# Altium PCB Ver1.0-2230_2023-12-28.pcbdoc
Units mm, origin at the board's own origin, x right, y up, seen from the top; angles counter-clockwise.
Board outline 52.32 x 60.2 mm, 2 copper layers (Top Layer, Bottom Layer); 27 components, 54 nets, 384 pads, 83 vias.
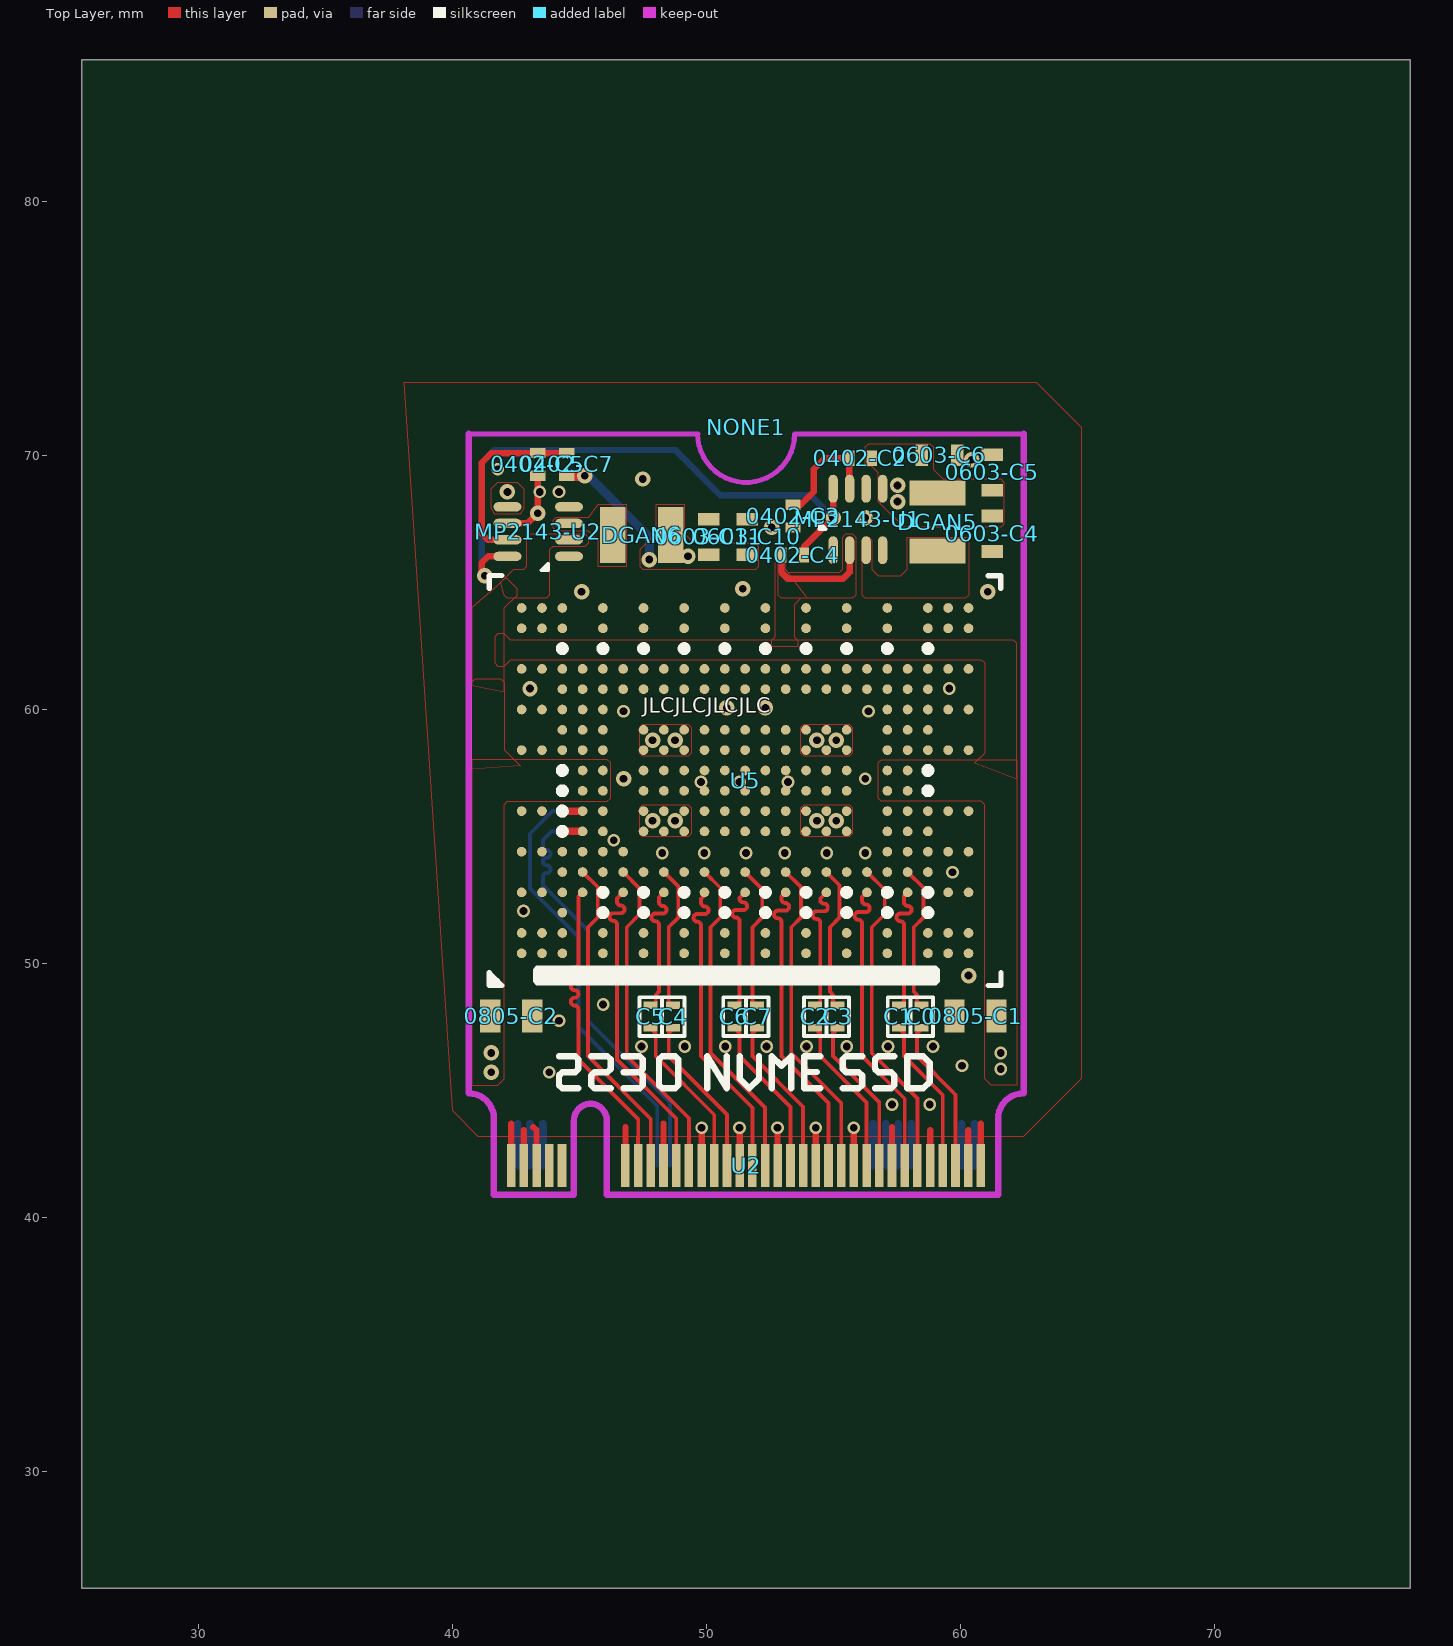
[diagram p0: Top Layer view]
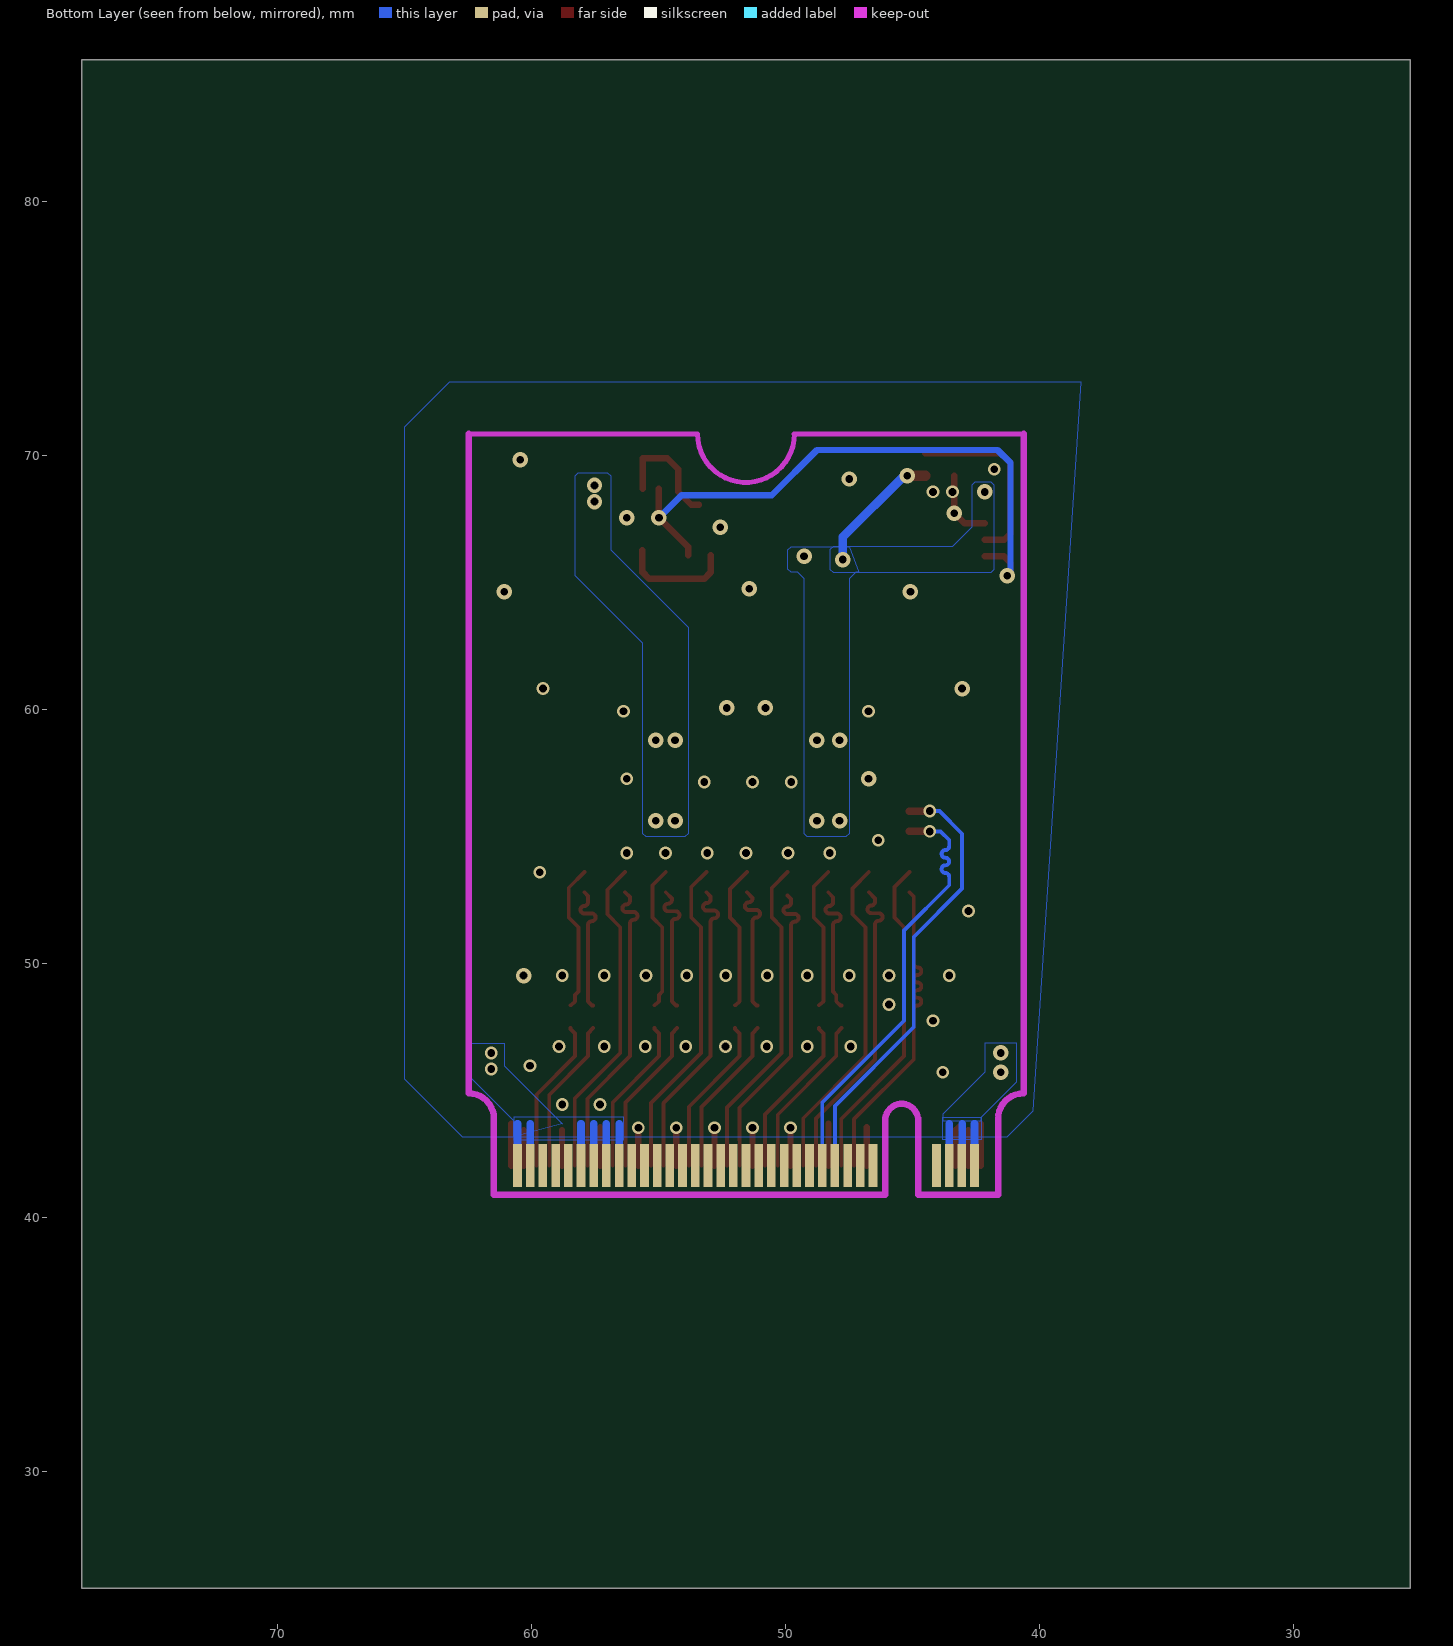
[diagram p1: Bottom Layer view, seen from below]

## Layer stack, top to bottom
Top Layer: signal copper (thickness not stored)
Dielectric: dielectric 0.32, FR-4, Dk 4.8
Bottom Layer: signal copper (thickness not stored)

## Board outline
77.724,25.4 25.4,25.4 25.4,85.598 77.724,85.598

## Components (designator, comment, footprint, x,y, rotation, side; value= is the part's Value field where it differs from the comment)
0402-C2 "_" ?#1 59.182,71.12 r0 top
0402-C3 "_" ?#1 52.197,70.739 r90 top
0402-C4 "_" ?#1 56.515,67.31 r0 top
0402-C5 "_" ?#1 44.577,66.548 r270 top
0402-C7 "_" ?#1 45.72,66.548 r270 top
0603-C4 "_" ?#2 62.484,64.008 r270 top
0603-C5 "_" ?#2 62.484,66.421 r270 top
0603-C6 "_" ?#2 62.103,71.247 r0 top
0603-C10 "_" ?#2 52.832,63.881 r270 top
0603-C11 "_" ?#2 51.308,63.881 r270 top
0805-C1 "_" ?#3 63.373,49.149 r0 top
0805-C2 "_" ?#3 45.085,49.149 r0 top
C0 "0402" ?#4 59.69,47.371 r270 top
C1 "0402" ?#4 58.801,47.371 r270 top
C2 "0402" ?#4 55.499,47.371 r270 top
C3 "0402" ?#4 56.388,47.371 r270 top
C4 "0402" ?#4 49.911,47.371 r270 top
C5 "0402" ?#4 49.022,47.371 r270 top
C6 "0402" ?#4 52.324,47.371 r270 top
C7 "0402" ?#4 53.213,47.371 r270 top
DGAN5 "_" ?#5 60.325,66.167 r270 top
DGAN6 "_" ?#5 46.228,65.659 r180 top
MP2143-U1 "_" ?#6 59.563,68.707 r0 top
MP2143-U2 "_" ?#6 42.164,70.612 r90 top
NONE1 "_" ?#7 51.562,71.12 r0 top
U2 "M.2 M KEY FINGERS" "M.2 M KEY FINGERS" 51.562,40.894 r270 top
U5 "1620 BGA291SSD" "1620 BGA291SSD" 51.435,57.15 r0 top

## Footprints (in the part's own frame and the unit in brackets; to place one, negate y for a bottom-side part, rotate by r counter-clockwise, add the part's x,y. Pads: shape width x height; smd on the part's side, far side on the other; paste and mask are expansions set on the pad)
"1620 BGA291SSD" [mil]
  round 15.06 smd paste-3937 mask+2: A1(-342.92,-265.44) A2(-342.92,-233.94) A4(-342.92,-170.95) A6(-342.92,-107.96) A8(-342.92,-44.97) A11(-342.92,49.52) A13(-342.92,112.51) A15(-342.92,175.51) A17(-342.92,238.5) A18(-342.92,269.99) AA1(287,-265.44) AA2(287,-233.94) AA5(287,-139.45) AA6(287,-107.96) AA7(287,-76.46) AA8(287,-44.97) AA11(287,49.52) AA12(287,81.02) AA13(287,112.51) AA14(287,144.01) AA15(287,175.51) AA17(287,238.5) AA18(287,269.99) AB1(318.5,-265.44) AB2(318.5,-233.94) AB4(318.5,-170.95) AB6(318.5,-107.96) AB8(318.5,-44.97) AB11(318.5,49.52) AB13(318.5,112.51) AB15(318.5,175.51) AB17(318.5,238.5) AB18(318.5,269.99) AC1(350,-265.44) AC2(350,-233.94) AC4(350,-170.95) AC6(350,-107.96) AC8(350,-44.97) AC11(350,49.52) AC13(350,112.51) AC15(350,175.51) AC17(350,238.5) AC18(350,269.99) B1(-311.42,-265.44) B2(-311.42,-233.94) B4(-311.42,-170.95) B6(-311.42,-107.96) B8(-311.42,-44.97) B11(-311.42,49.52) B13(-311.42,112.51) B15(-311.42,175.51) B17(-311.42,238.5) B18(-311.42,269.99) C1(-279.92,-265.44) C2(-279.92,-233.94) C3(-279.92,-202.44) C4(-279.92,-170.95) C5(-279.92,-139.45) C6(-279.92,-107.96) C11(-279.92,49.52) C12(-279.92,81.02) C13(-279.92,112.51) C14(-279.92,144.01) C15(-279.92,175.51) C17(-279.92,238.5) C18(-279.92,269.99) D4(-248.43,-170.95) D5(-248.43,-139.45) D6(-248.43,-107.96) D7(-248.43,-76.46) D8(-248.43,-44.97) D9(-248.43,-13.47) D10(-248.43,18.03) D11(-248.43,49.52) D12(-248.43,81.02) D13(-248.43,112.51) D14(-248.43,144.01) D15(-248.43,175.51) E1(-216.93,-265.44) E2(-216.93,-233.94) E5(-216.93,-139.45) E6(-216.93,-107.96) E7(-216.93,-76.46) E8(-216.93,-44.97) E9(-216.93,-13.47) E10(-216.93,18.03) E11(-216.93,49.52) E12(-216.93,81.02) E13(-216.93,112.51) E14(-216.93,144.01) E15(-216.93,175.51) E17(-216.93,238.5) E18(-216.93,269.99) F4(-185.44,-170.95) F5(-185.44,-139.45) F6(-185.44,-107.96) F14(-185.44,144.01) F15(-185.44,175.51) G1(-153.94,-265.44) G2(-153.94,-233.94) G5(-153.94,-139.45) G7(-153.94,-76.46) G8(-153.94,-44.97) G9(-153.94,-13.47) G10(-153.94,18.03) G11(-153.94,49.52) G12(-153.94,81.02) G14(-153.94,144.01) G15(-153.94,175.51) G17(-153.94,238.5) G18(-153.94,269.99) H4(-122.44,-170.95) H5(-122.44,-139.45) H7(-122.44,-76.46) H8(-122.44,-44.97) H9(-122.44,-13.47) H10(-122.44,18.03) H11(-122.44,49.52) H12(-122.44,81.02) H14(-122.44,144.01) H15(-122.44,175.51) J1(-90.95,-265.44) J2(-90.95,-233.94) J5(-90.95,-139.45) J7(-90.95,-76.46) J8(-90.95,-44.97) J9(-90.95,-13.47) J10(-90.95,18.03) J11(-90.95,49.52) J12(-90.95,81.02) J14(-90.95,144.01) J15(-90.95,175.51) J17(-90.95,238.5) J18(-90.95,269.99) K4(-59.45,-170.95) K5(-59.45,-139.45) K7(-59.45,-76.46) K8(-59.45,-44.97) K9(-59.45,-13.47) K10(-59.45,18.03) K11(-59.45,49.52) K12(-59.45,81.02) K14(-59.45,144.01) K15(-59.45,175.51) L1(-27.96,-265.44) L2(-27.96,-233.94) L5(-27.96,-139.45) L7(-27.96,-76.46) L8(-27.96,-44.97) L9(-27.96,-13.47) L10(-27.96,18.03) L11(-27.96,49.52) L12(-27.96,81.02) L14(-27.96,144.01) L15(-27.96,175.51) L17(-27.96,238.5) L18(-27.96,269.99) M4(3.54,-170.95) M5(3.54,-139.45) M7(3.54,-76.46) M8(3.54,-44.97) M9(3.54,-13.47) M10(3.54,18.03) M11(3.54,49.52) M12(3.54,81.02) M14(3.54,144.01) M15(3.54,175.51) N1(35.04,-265.44) N2(35.04,-233.94) N5(35.04,-139.45) N7(35.04,-76.46) N8(35.04,-44.97) N9(35.04,-13.47) N10(35.04,18.03) N11(35.04,49.52) N12(35.04,81.02) N14(35.04,144.01) N15(35.04,175.51) N17(35.04,238.5) N18(35.04,269.99) P4(66.53,-170.95) P5(66.53,-139.45) P7(66.53,-76.46) P8(66.53,-44.97) P9(66.53,-13.47) P10(66.53,18.03) P11(66.53,49.52) P12(66.53,81.02) P14(66.53,144.01) P15(66.53,175.51) R1(98.03,-265.44) R2(98.03,-233.94) R5(98.03,-139.45) R7(98.03,-76.46) R8(98.03,-44.97) R9(98.03,-13.47) R10(98.03,18.03) R11(98.03,49.52) R12(98.03,81.02) R14(98.03,144.01) R15(98.03,175.51) R17(98.03,238.5) R18(98.03,269.99) T4(129.52,-170.95) T5(129.52,-139.45) T7(129.52,-76.46) T8(129.52,-44.97) T9(129.52,-13.47) T10(129.52,18.03) T11(129.52,49.52) T12(129.52,81.02) T14(129.52,144.01) T15(129.52,175.51) U1(161.02,-265.44) U2(161.02,-233.94) U5(161.02,-139.45) U7(161.02,-76.46) U8(161.02,-44.97) U9(161.02,-13.47) U10(161.02,18.03) U11(161.02,49.52) U12(161.02,81.02) U14(161.02,144.01) U15(161.02,175.51) U17(161.02,238.5) U18(161.02,269.99) V4(192.52,-170.95) V5(192.52,-139.45) V14(192.52,144.01) V15(192.52,175.51) W1(224.01,-265.44) W2(224.01,-233.94) W5(224.01,-139.45) W6(224.01,-107.96) W7(224.01,-76.46) W8(224.01,-44.97) W9(224.01,-13.47) W10(224.01,18.03) W11(224.01,49.52) W12(224.01,81.02) W13(224.01,112.51) W14(224.01,144.01) W15(224.01,175.51) W17(224.01,238.5) W18(224.01,269.99) Y4(255.51,-170.95) Y5(255.51,-139.45) Y6(255.51,-107.96) Y7(255.51,-76.46) Y8(255.51,-44.97) Y9(255.51,-13.47) Y10(255.51,18.03) Y11(255.51,49.52) Y12(255.51,81.02) Y13(255.51,112.51) Y14(255.51,144.01) Y15(255.51,175.51)
  silkscreen extent -393,-316 400,320
"M.2 M KEY FINGERS" [mm]
  rect 1.7x0.34 smd paste+0 mask+0.102: 1(-1.15,9.25) 3(-1.15,8.75) 5(-1.15,8.249) 7(-1.15,7.749) 9(-1.15,7.249) 11(-1.15,6.749) 13(-1.15,6.249) 15(-1.15,5.749) 17(-1.15,5.249) 19(-1.15,4.749) 21(-1.15,4.249) 23(-1.15,3.749) 25(-1.15,3.249) 27(-1.15,2.749) 29(-1.15,2.249) 31(-1.15,1.749) 33(-1.15,1.249) 35(-1.15,0.749) 37(-1.15,0.249) 39(-1.15,-0.251) 41(-1.15,-0.751) 43(-1.15,-1.251) 45(-1.15,-1.751) 47(-1.15,-2.251) 49(-1.15,-2.751) 51(-1.15,-3.251) 53(-1.15,-3.751) 55(-1.15,-4.251) 57(-1.15,-4.751) 67(-1.15,-7.251) 69(-1.15,-7.751) 71(-1.15,-8.251) 73(-1.15,-8.751) 75(-1.15,-9.251)
  rect 1.7x0.34 smd far side paste+0 mask+0.102: 2(-1.15,9) 4(-1.15,8.501) 6(-1.15,8.001) 8(-1.15,7.501) 10(-1.15,7.001) 12(-1.15,6.501) 14(-1.15,6.001) 16(-1.15,5.501) 18(-1.15,5.001) 20(-1.151,4.499) 22(-1.15,4.001) 24(-1.15,3.501) 26(-1.15,3.001) 28(-1.15,2.501) 30(-1.15,2.001) 32(-1.15,1.501) 34(-1.15,1.001) 36(-1.15,0.501) 38(-1.15,0.001) 40(-1.15,-0.499) 42(-1.151,-0.998) 44(-1.15,-1.499) 46(-1.15,-1.999) 48(-1.15,-2.499) 50(-1.15,-2.999) 52(-1.15,-3.499) 54(-1.15,-3.999) 56(-1.15,-4.499) 58(-1.15,-4.999) 68(-1.15,-7.499) 70(-1.15,-7.999) 72(-1.15,-8.499) 74(-1.15,-8.999)
  Keep-Out Layer lines w0.254: -3,-9.93 0,-9.93 0,-6.78 -2.9,-6.78 ; -2.9,-5.48 0,-5.48 0,9.93 -3,9.93
  Keep-Out Layer lines w0.254: -4,-10.93 cw(c-3,-10.93) -3,-9.93 ; -2.9,-6.78 cw(c-2.931,-6.13) -2.9,-5.48 ; -3,9.93 cw(c-3,10.93) -4,10.93
?#1 [mm]
  rect 0.4x0.6 smd paste+0 mask+0.051: 1(-3.557,-1.217) 1(-2.668,-1.217)
?#2 [mm]
  rect 0.5x0.85 smd paste+0 mask+0.051: 2(-3.624,-1.219) 2(-2.227,-1.219)
?#3 [mm]
  rect 0.8x1.3 smd paste+0 mask+0.05: 1(-1.947,-1.217) 2(-3.598,-1.217)
?#4 [mm]
  rect 0.3x0.55 smd paste+0 mask+0.051: 1(-0.985,-1.217) 1(-0.096,-1.217)
  silkscreen extent -1.31,-1.66 0.22,-0.77
?#5 [mm]
  rect 1x2.2 smd paste+0 mask+0.05: 2(-2.369,-1.219) 2(-0.083,-1.219)
?#6 [mm]
  oval 0.364x1.1 smd paste+0 mask+0.051: 1(-4.571,-2.423) 2(-3.921,-2.423) 3(-3.271,-2.423) 4(-2.62,-2.423) 5(-2.62,-0.001) 6(-3.271,-0.001) 7(-3.921,-0.001) 8(-4.571,-0.001)
  silkscreen extent -5.12,-1.59 -4.87,-1.34
?#7 [mm]
  Keep-Out Layer lines w0.2: -10.93,-0.257 -1.9,-0.257 ; 1.91,-0.257 10.93,-0.257
  Keep-Out Layer lines w0.2: -1.904,-0.257 ccw(c0.005,-0.257) 1.914,-0.257

## Via types
v1: diameter 0.5, hole 0.305, Top Layer to Bottom Layer, tented both sides, 52 vias
v2: diameter 0.61, hole 0.305, Top Layer to Bottom Layer, tented both sides, 31 vias

## Nets (pads, with @x,y where several pads share a name; then routed paths per layer and width w, separated by ;. In a path a pad name is that pad's centre, name@x,y a point inside that pad or via, vN(x,y) a via of type N, cw(c..) or ccw(c..) an arc to the next point about the centre after c; other vN are vias at no path point)
1.2V: 0402-C7.1@44.503,69.216 0603-C10.2@51.613,66.108 0603-C11.2@50.089,66.108 DGAN6.2@48.597,66.878 MP2143-U2.5 U5.G7 U5.G8 U5.G11 U5.G12 U5.H7 U5.H8 U5.H11 U5.H12 U5.J7 U5.J8 U5.J11 U5.J12 | length 5.1
  Top Layer w0.4: 0402-C7.1@44.503,69.215 v2(45.212,69.215)
  Bottom Layer w0.35: v2(45.212,69.215) 45.339,69.215 47.752,66.802 v2(47.752,65.913)
  other v2: 47.879,55.626 48.768,55.626 47.879,58.801 48.768,58.801 49.276,66.04 42.164,68.58
1.8V: 0402-C2.1@56.514,69.903 0603-C4.2@61.265,67.632 0603-C5.2@61.265,68.648 0603-C6.2@58.479,70.028 DGAN5.2@59.106,68.536 MP2143-U1.5 U5.R7 U5.R8 U5.R11 U5.R12 U5.T7 U5.T8 U5.T11 U5.T12 U5.U7 U5.U8 U5.U11 U5.U12
  other v2: 54.356,55.626 55.118,55.626 54.356,58.801 55.118,58.801 57.531,68.199 57.531,68.834
3.3V: 0402-C4.1@52.958,66.093 0805-C1.1 0805-C2.2 MP2143-U1.2 MP2143-U2.2 U2.2 U2.4 U2.12 U2.14 U2.16 U2.18 U2.70 U2.72 U2.74 U5.D9 U5.D10 U5.E9 U5.E10 U5.W9 U5.W10 U5.Y9 U5.Y10 | length 19.2
  Top Layer w0.254: 0402-C4.1@52.958,66.093 52.958,65.406 53.213,65.151 55.372,65.151 55.642,65.421 MP2143-U1.2
  Bottom Layer w0.3: U2.74 42.563,43.688 ; 43.053,43.688 U2.72 ; U2.70 43.563,43.688 ; U2.18 56.563,43.688 ; U2.16 57.064,43.688 ; U2.14 57.563,43.688 ; U2.12 58.063,43.688 ; U2.4 60.063,43.688 ; U2.2 60.562,43.688
  other v1: 61.595,45.847 61.595,46.482
  other v2: 41.529,45.72 41.529,46.482
EN: 0402-C4.1@53.847,66.093 MP2143-U1.8 MP2143-U2.8 | length 24.4
  Top Layer w0.25: v2(41.275,65.278) 41.148,65.405 41.148,65.786 41.403,66.041 MP2143-U2.8
  Top Layer w0.254: 0402-C4.1@53.847,66.093 53.847,66.42 v2(54.991,67.564) 54.992,67.565 MP2143-U1.8
  Bottom Layer w0.25: v2(41.275,65.278) 41.148,65.405 41.148,69.723 41.656,70.231 48.768,70.231 50.546,68.453 54.102,68.453 v2(54.991,67.564)
FB: 0402-C2.1@55.625,69.903 0402-C3.1@53.414,68.071 0402-C5.1@43.36,70.105 0402-C7.1@44.503,70.105 MP2143-U1.7 MP2143-U2.7 | length 12.1
  Top Layer w0.254: MP2143-U2.7 41.387,66.69 41.148,66.929 41.148,69.723 41.529,70.104 0402-C5.1@43.36,70.104 ; 0402-C5.1@43.36,70.105 0402-C7.1@44.503,70.105 ; 0402-C3.1@53.414,68.071 53.72,68.071 54.229,68.58 54.229,69.469 54.663,69.903 55.625,69.903 MP2143-U1.7@55.625,68.706
GND: 0402-C3.1@53.414,67.182 0402-C5.1@43.36,69.216 0603-C4.2@61.265,66.235 0603-C5.2@61.265,70.045 0603-C6.2@59.876,70.028 0603-C10.2@51.613,67.505 0603-C11.2@50.089,67.505 0805-C1.2 0805-C2.1 MP2143-U1.4 MP2143-U1.6 MP2143-U2.4 MP2143-U2.6 U2.1 U2.3 U2.9 U2.15 U2.21 U2.27 U2.33 U2.39 U2.45 U2.51 U2.57 U2.71 U2.73 U2.75 U5.AA1 U5.AA2 U5.AA5 U5.AA14 U5.AA15 U5.C1 U5.C2 U5.C3 U5.C4 U5.C5 U5.C15 U5.D6 U5.D11 U5.E1 U5.E2 U5.E5 U5.E6 U5.E7 U5.E11 U5.E14 U5.E15 U5.F6 U5.G1 U5.G2 U5.G5 U5.G9 U5.G10 U5.G14 U5.G15 U5.H9 U5.H10 U5.J1 U5.J2 U5.J5 U5.J9 U5.J10 U5.J14 U5.J15 U5.K7 U5.K8 U5.K9 U5.K10 U5.K11 U5.K12 U5.L1 U5.L2 U5.L5 U5.L14 U5.L15 U5.M9 U5.M10 U5.N1 U5.N2 U5.N5 U5.N14 U5.N15 U5.P7 U5.P8 U5.P9 U5.P10 U5.P11 U5.P12 U5.R1 U5.R2 U5.R5 U5.R9 U5.R10 U5.R14 U5.R15 U5.T9 U5.T10 U5.U1 U5.U2 U5.U5 U5.U9 U5.U10 U5.U14 U5.U15 U5.W1 U5.W2 U5.W5 U5.W6 U5.W11 U5.W14 U5.W15 U5.Y6 U5.Y11 U5.Y13 | length 40.4
  Top Layer w0.2: U2.75 42.311,43.434 ; U2.73 42.811,43.307 ; U2.71 43.311,43.434 ; U2.57 46.811,43.307 ; U2.51 48.311,43.307 ; U2.45 49.811,43.18 ; U2.39 51.311,43.18 ; U2.33 52.811,43.18 ; U2.27 54.311,43.18 ; U2.15 57.311,43.307 ; U2.9 58.811,43.307 ; U2.3 60.312,43.434 ; U2.1 60.812,43.434
  Top Layer w0.25: U2.75 42.311,43.688 ; U2.73 42.811,43.434 ; 43.18,43.561 43.311,43.43 U2.71 ; U2.57 46.811,43.561 ; U2.51 48.311,43.688 ; U2.45 v1(49.812,43.532) ; v1(51.308,43.532) U2.39 ; v1(52.802,43.532) U2.33 ; U2.27 v1(54.312,43.532) ; v1(55.802,43.532) U2.21 ; U2.15 57.311,43.561 ; U2.9 58.811,43.434 ; U2.3 60.312,43.434 ; U2.1 60.812,43.688
  Top Layer w0.254: MP2143-U2.6 42.957,67.341 v2(43.36,67.744) 0402-C5.1@43.36,69.216
  other v1: 57.312,44.45 58.801,44.45 43.815,45.72 60.071,45.974 47.442,46.736 49.149,46.736 50.742,46.736 52.372,46.736 53.942,46.736 55.532,46.736 57.15,46.736 58.928,46.736 44.196,47.752 45.932,48.387 43.561,49.53 45.932,49.53 47.498,49.53 49.149,49.53 50.722,49.53 52.362,49.53 53.902,49.53 55.499,49.53 57.15,49.53 58.801,49.53 42.799,52.07 59.69,53.594 48.26,54.356 49.911,54.356 51.562,54.356 53.086,54.356 54.737,54.356 56.261,54.356 46.355,54.864 49.784,57.15 51.308,57.15 53.213,57.15 56.261,57.277 46.736,59.944 56.388,59.944 59.563,60.833 43.434,68.58 44.196,68.58 41.783,69.469
  other v2: 60.325,49.53 46.736,57.277 50.8,60.071 52.324,60.071 43.053,60.833 45.085,64.643 61.087,64.643 51.435,64.77 52.578,67.183 56.261,67.564 47.498,69.088 60.452,69.85
POWERGOOD: MP2143-U1.1 MP2143-U2.1
S$17489: 
S$17493: 
S$31860: 
S$31862: 
S$55852: 
S$81905: 
S$82656: U2.13 U5.V4 | length 12.3
  Top Layer w0.15: U5.V4 56.134,52.619 56.134,52.48 ccw(c56.284,52.48) 56.284,52.33 cw(c56.282,52.18) 56.284,52.03 56.134,52.03 55.984,52.03 ccw(c55.986,51.88) 55.984,51.73 cw(c55.984,51.58) 56.134,51.58 56.134,46.355 57.81,44.679 U2.13
S$82660: U2.11 U5.V5 | length 12.8
  Top Layer w0.15: U5.V5 57.023,52.911 57.023,51.943 56.515,51.435 56.515,46.482 58.311,44.686 U2.11
S$89547: C1.1 U2.7 U5.Y4 | length 11.6
  Top Layer w0.15: C1.1@57.584,48.356 57.627,48.356 57.785,48.514 57.785,48.768 57.785,51.522 ccw(c57.635,51.522) 57.635,51.672 cw(c57.637,51.822) 57.635,51.972 57.785,51.972 57.935,51.972 ccw(c57.933,52.122) 57.935,52.272 cw(c57.935,52.422) 57.785,52.422 57.785,52.668 U5.Y4@57.925,52.808 ; C1.1@57.584,47.468 57.785,47.244 57.785,46.99 57.785,46.355 59.312,44.828 U2.7
S$89551: C0.1 U2.5 U5.Y5 | length 11.9
  Top Layer w0.15: U5.Y5 58.547,52.987 58.547,51.816 58.166,51.435 58.166,48.895 58.293,48.768 58.293,48.514 C0.1@58.473,48.357 ; C0.1@58.473,47.468 58.473,47.424 58.293,47.244 58.293,46.99 58.293,46.355 59.812,44.836 U2.5
S$89662: C2.1@54.282,47.467 | length 6.3
  Top Layer w0.15: C2.1@54.282,47.468 54.483,47.244 54.483,46.99 54.483,46.355 56.312,44.526 56.312,43.129 ; 56.311,42.044 56.311,43.18
S$89666: C3.1@55.171,47.467 | length 6.3
  Top Layer w0.15: C3.1@55.171,47.468 55.171,47.424 54.991,47.244 54.991,46.99 54.991,46.355 56.812,44.534 56.812,43.086 ; 56.811,42.044 56.811,43.18
S$89676: C2.1@54.282,48.356 U5.T4 | length 5.5
  Top Layer w0.15: C2.1@54.282,48.356 54.325,48.356 54.483,48.514 54.483,48.641 54.483,51.611 ccw(c54.333,51.611) 54.333,51.761 cw(c54.335,51.911) 54.333,52.061 54.483,52.061 54.633,52.061 ccw(c54.631,52.211) 54.633,52.361 cw(c54.633,52.511) 54.483,52.511 54.483,52.566 U5.T4@54.725,52.808
S$89680: C3.1@55.171,48.356 U5.T5 | length 5.8
  Top Layer w0.15: U5.T5 55.245,53.089 55.245,51.816 54.864,51.435 54.864,48.895 54.991,48.768 54.991,48.641 54.991,48.514 C3.1@55.171,48.357
S$89714: U5.P5 | length 12.8
  Top Layer w0.15: U5.P5 53.721,53.012 53.721,51.816 53.34,51.435 53.34,46.482 55.311,44.511 55.311,43.18 55.311,42.044
S$89718: U5.P4 | length 12.4
  Top Layer w0.15: U5.P4@53.125,52.808 52.959,52.642 52.959,52.536 ccw(c53.109,52.536) 53.109,52.386 cw(c53.107,52.236) 53.109,52.086 52.959,52.086 52.809,52.086 ccw(c52.811,51.936) 52.809,51.786 cw(c52.809,51.636) 52.959,51.636 52.959,46.355 54.811,44.503 54.811,43.18 54.811,42.044
S$89746: C7.1@51.996,47.467 | length 6.4
  Top Layer w0.15: C7.1@51.996,47.468 51.996,47.424 51.816,47.244 51.816,47.117 51.816,46.355 53.811,44.36 53.811,43.094 ; 53.811,42.044 53.811,43.18
S$89750: C6.1@51.107,47.467 | length 6.3
  Top Layer w0.15: C6.1@51.107,47.468 51.308,47.244 51.308,47.117 51.308,46.355 53.312,44.351 53.312,43.18 ; 53.311,42.044 53.311,43.18
S$89763: C6.1@51.107,48.356 U5.M4 | length 5.5
  Top Layer w0.15: C6.1@51.107,48.356 51.15,48.356 51.308,48.514 51.308,48.641 51.308,51.665 ccw(c51.158,51.665) 51.158,51.815 cw(c51.16,51.965) 51.158,52.115 51.308,52.115 51.458,52.115 ccw(c51.456,52.265) 51.458,52.415 cw(c51.458,52.565) 51.308,52.565 51.308,52.591 U5.M4@51.525,52.808
S$89767: C7.1@51.996,48.356 U5.M5 | length 5.8
  Top Layer w0.15: U5.M5@51.525,53.608 52.197,52.936 52.197,51.816 51.816,51.435 51.816,48.641 51.816,48.514 C7.1@51.996,48.357
S$89801: U5.K5 | length 12.9
  Top Layer w0.15: U5.K5@49.925,53.608 50.546,52.987 50.546,51.816 50.165,51.435 50.165,46.482 52.311,44.336 52.311,43.18 52.311,42.044
S$89805: U5.K4 | length 12.5
  Top Layer w0.15: U5.K4@49.93,52.681 49.789,52.54 49.789,52.403 ccw(c49.939,52.403) 49.939,52.253 cw(c49.937,52.103) 49.939,51.953 49.789,51.953 49.639,51.953 ccw(c49.641,51.803) 49.639,51.653 cw(c49.639,51.503) 49.789,51.503 49.789,46.35 51.816,44.323 51.816,43.053 ; 51.811,42.044 51.811,43.18
S$89833: C4.1@48.694,47.467 | length 6.4
  Top Layer w0.15: C4.1@48.694,47.468 48.694,47.424 48.514,47.244 48.514,46.99 48.514,46.355 50.811,44.058 50.811,43.18 50.811,42.044
S$89837: C5.1@47.805,47.467 | length 6.5
  Top Layer w0.15: C5.1@47.805,47.468 48.006,47.244 48.006,46.99 48.006,46.355 50.312,44.049 50.312,43.18 ; 50.311,42.044 50.311,43.18
S$89847: C5.1@47.805,48.356 U5.H4 | length 5.5
  Top Layer w0.15: C5.1@47.805,48.356 47.848,48.356 48.006,48.514 48.006,48.641 48.006,48.768 48.133,48.895 48.133,51.521 ccw(c47.983,51.521) 47.983,51.671 cw(c47.985,51.821) 47.983,51.971 48.133,51.971 48.283,51.971 ccw(c48.281,52.121) 48.283,52.271 cw(c48.283,52.421) 48.133,52.421 48.133,52.616 U5.H4@48.325,52.808
S$89851: C4.1@48.694,48.356 U5.H5 | length 5.7
  Top Layer w0.15: U5.H5 48.895,53.038 48.895,51.816 48.514,51.435 48.514,48.641 48.514,48.514 C4.1@48.694,48.357
S$89888: U5.F5 | length 13.1
  Top Layer w0.15: U5.F5 47.371,52.962 47.371,51.943 46.863,51.435 46.863,46.355 49.312,43.906 49.312,43.18 49.311,42.044
S$89898: U5.F4 | length 12.6
  Top Layer w0.15: U5.F4@46.725,52.808 46.482,52.565 46.482,52.437 ccw(c46.632,52.437) 46.632,52.287 cw(c46.63,52.137) 46.632,51.987 46.482,51.987 46.332,51.987 ccw(c46.334,51.837) 46.332,51.687 cw(c46.332,51.537) 46.482,51.537 46.482,46.228 48.811,43.899 48.811,43.18 48.811,42.044
S$89926: U5.D5 | length 13
  Top Layer w0.15: U5.D5 45.72,53.012 45.72,51.816 45.339,51.435 45.339,46.355 47.81,43.884 47.81,43.18 ; 47.811,42.044 47.811,43.18
S$89930: U5.D4 | length 12.8
  Top Layer w0.15: U5.D4@45.125,52.808 44.958,52.641 44.958,50.004 cw(c44.808,50.004) 44.808,49.854 ccw(c44.808,49.704) 44.808,49.554 cw(c44.808,49.404) 44.958,49.404 cw(c44.808,49.404) 44.808,49.254 ccw(c44.808,49.104) 44.808,48.954 cw(c44.808,48.804) 44.958,48.804 cw(c44.808,48.804) 44.808,48.654 ccw(c44.808,48.504) 44.808,48.354 cw(c44.808,48.204) 44.958,48.204 44.958,46.228 47.313,43.873 47.313,43.18 ; 47.311,42.044 47.311,43.18
S$89994: U2.50 U2.52 | length 34.9
  Top Layer w0.3: v1(44.325,55.208) 45.125,55.208 ; v1(44.325,56.008) 45.125,56.008
  Bottom Layer w0.15: v1(44.325,55.208) 43.905,55.208 43.561,54.864 43.561,54.622 ccw(c43.711,54.622) 43.711,54.472 cw(c43.711,54.322) 43.711,54.171 ccw(c43.711,54.021) 43.561,54.021 ccw(c43.711,54.021) 43.711,53.871 cw(c43.711,53.721) 43.711,53.571 ccw(c43.711,53.421) 43.561,53.422 43.561,53.086 45.339,51.308 45.339,50.866 45.339,47.752 48.562,44.529 U2.50 ; v1(44.325,56.008) 43.942,56.007 43.053,55.118 43.053,52.959 44.958,51.054 44.958,50.871 44.958,47.498 48.062,44.394 U2.52
S$115904: 
S$147674: 
S$147709: 
S$158636: 
S$158670: 
S$158674: 
S$158678: 
S$158712: 
S$158716: 
S$158720: 
S$158727: 
S$158731: 
S$158735: 
S$158745: 
S$158749: 
SW: DGAN5.2@59.106,66.25 DGAN6.2@46.311,66.878 MP2143-U1.3 MP2143-U2.3
pads on no net: U2.6 U2.8 U2.10 U2.17 U2.19 U2.20 U2.22 U2.23 U2.24 U2.25 U2.26 U2.28 U2.29 U2.30 U2.31 U2.32 U2.34 U2.35 U2.36 U2.37 U2.38 U2.40 U2.41 U2.42 U2.43 U2.44 U2.46 U2.47 U2.48 U2.49 U2.53 U2.54 U2.55 U2.56 U2.58 U2.67 U2.68 U2.69 U5.A1 U5.A2 U5.A4 U5.A6 U5.A8 U5.A11 U5.A13 U5.A15 U5.A17 U5.A18 U5.AA6 U5.AA7 U5.AA8 U5.AA11 U5.AA12 U5.AA13 U5.AA17 U5.AA18 U5.AB1 U5.AB2 U5.AB4 U5.AB6 U5.AB8 U5.AB11 U5.AB13 U5.AB15 U5.AB17 U5.AB18 U5.AC1 U5.AC2 U5.AC4 U5.AC6 U5.AC8 U5.AC11 U5.AC13 U5.AC15 U5.AC17 U5.AC18 U5.B1 U5.B2 U5.B4 U5.B6 U5.B8 U5.B11 U5.B13 U5.B15 U5.B17 U5.B18 U5.C6 U5.C11 U5.C12 U5.C13 U5.C14 U5.C17 U5.C18 U5.D7 U5.D8 U5.D12 U5.D13 U5.D14 U5.D15 U5.E8 U5.E12 U5.E13 U5.E17 U5.E18 U5.F14 U5.F15 U5.G17 U5.G18 U5.H14 U5.H15 U5.J17 U5.J18 U5.K14 U5.K15 U5.L7 U5.L8 U5.L9 U5.L10 U5.L11 U5.L12 U5.L17 U5.L18 U5.M7 U5.M8 U5.M11 U5.M12 U5.M14 U5.M15 U5.N7 U5.N8 U5.N9 U5.N10 U5.N11 U5.N12 U5.N17 U5.N18 U5.P14 U5.P15 U5.R17 U5.R18 U5.T14 U5.T15 U5.U17 U5.U18 U5.V14 U5.V15 U5.W7 U5.W8 U5.W12 U5.W13 U5.W17 U5.W18 U5.Y7 U5.Y8 U5.Y12 U5.Y14 U5.Y15

## Polygon pours and split planes (outlines as drawn)
3.3V on Bottom Layer (solid): 60.706,43.053 56.388,43.053 56.388,43.942 60.706,43.942
3.3V on Bottom Layer (solid): 42.291,43.053 43.815,43.053 43.815,43.942 42.291,43.942
3.3V on Bottom Layer (solid): 42.164,46.863 42.164,45.72 43.815,44.069 43.815,43.815 42.291,43.815 42.291,43.942 40.894,45.339 40.894,46.863
3.3V on Bottom Layer (solid): 60.706,43.18 60.706,43.815 62.357,45.466 62.357,46.863 61.087,46.863 61.087,45.974 58.801,43.688
1.2V on Bottom Layer (solid): 42.418,68.961 42.545,68.961 42.672,68.834 42.672,67.183 43.434,66.421 48.133,66.421 48.26,66.294 48.26,65.532 48.133,65.405 41.91,65.405 41.783,65.532 41.783,68.834 41.91,68.961
1.8V on Bottom Layer (solid): 53.848,55.118 53.975,54.991 55.499,54.991 55.626,55.118 55.626,62.611 58.293,65.278 58.293,69.215 58.166,69.342 57.023,69.342 56.896,69.215 56.896,66.294 53.848,63.246
1.2V on Bottom Layer (solid): 49.149,54.991 49.276,55.118 49.276,65.151 49.53,65.405 49.784,65.405 49.911,65.532 49.911,66.294 49.784,66.421 47.498,66.421 47.117,65.405 47.244,65.405 47.498,65.151 47.498,55.118 47.625,54.991
GND on Bottom Layer (solid): 38.354,72.898 63.246,72.898 65.024,71.12 65.024,45.466 62.738,43.18 41.275,43.18 40.259,44.196
3.3V on Top Layer (solid): 42.037,45.466 42.037,56.261 42.164,56.388 46.101,56.388 46.228,56.515 46.228,57.912 46.101,58.039 40.767,58.039 40.767,45.212 41.783,45.212
3.3V on Top Layer (solid): 60.96,45.466 60.96,56.261 60.833,56.388 56.896,56.388 56.769,56.515 56.769,57.912 56.896,58.039 62.23,58.039 62.23,45.212 61.214,45.212
1.8V on Top Layer (solid): 53.848,59.436 55.626,59.436 55.753,59.309 55.753,58.293 55.626,58.166 53.848,58.166 53.721,58.293 53.721,59.309
1.8V on Top Layer (solid): 53.848,56.261 55.626,56.261 55.753,56.134 55.753,55.118 55.626,54.991 53.848,54.991 53.721,55.118 53.721,56.134
1.2V on Top Layer (solid): 47.498,59.436 49.276,59.436 49.403,59.309 49.403,58.293 49.276,58.166 47.498,58.166 47.371,58.293 47.371,59.309
1.2V on Top Layer (solid): 47.498,56.261 49.276,56.261 49.403,56.134 49.403,55.118 49.276,54.991 47.498,54.991 47.371,55.118 47.371,56.134
1.8V on Top Layer (solid): 59.563,69.088 61.595,69.088 61.722,68.961 61.722,67.31 61.595,67.183 57.785,67.183 56.769,68.199 56.769,69.342 56.515,69.596 56.261,69.596 56.261,70.358 56.388,70.485 58.801,70.485 58.928,70.358 58.928,69.469 59.309,69.088
SW on Top Layer (solid): 60.325,66.802 60.325,64.516 60.198,64.389 56.261,64.389 56.134,64.516 56.134,66.675 56.261,66.802 56.388,66.802 56.515,66.675 56.515,65.532 56.769,65.278 57.658,65.278 57.912,65.532 57.912,66.675 57.912,66.802 58.039,66.802
SW on Top Layer (solid): 44.069,67.564 43.942,67.437 43.942,67.183 44.069,67.056 45.339,67.056 45.72,66.675 45.72,65.659 46.863,65.659 46.863,68.072 45.72,68.072 45.339,67.564
1.2V on Top Layer (solid): 41.529,67.945 41.529,68.707 41.783,68.961 42.545,68.961 42.799,68.707 42.799,67.945 42.672,67.691 41.656,67.691
1.2V on Top Layer (solid): 48.006,68.072 48.006,66.929 47.371,66.294 47.371,65.659 47.498,65.532 51.943,65.532 52.07,65.659 52.07,66.421 51.943,66.548 49.53,66.548 49.149,66.929 49.149,68.072
3.3V on Top Layer (solid): 55.753,66.929 55.88,66.802 55.88,64.516 55.753,64.389 52.959,64.389 52.832,64.516 52.832,65.786 53.086,65.786 53.086,65.532 53.213,65.405 55.245,65.405 55.372,65.532 55.372,66.802 55.499,66.929
3.3V on Top Layer (solid): 45.085,66.929 45.212,66.929 45.339,66.802 45.339,66.548 45.212,66.421 43.942,66.421 43.815,66.294 43.815,64.516 43.688,64.389 42.164,64.389 42.037,64.516 41.91,65.024 42.037,65.151 42.418,65.532 42.799,65.532 42.926,65.659 42.926,66.802 43.053,66.929
3.3V on Top Layer (solid): 40.767,57.658 40.767,61.087 40.894,61.214 41.91,61.214 42.037,61.087 42.037,58.42 42.672,57.785
3.3V on Top Layer (solid): 42.037,60.706 42.037,64.008 42.545,64.516 42.545,64.77 42.164,65.151 42.037,65.151 41.783,64.897 40.767,64.008 40.767,60.96
3.3V on Top Layer (solid): 62.23,57.277 62.23,62.611 62.103,62.738 42.291,62.738 42.037,62.992 41.783,62.992 41.656,62.865 41.656,61.849 41.783,61.722 42.037,61.722 42.291,61.976 60.833,61.976 60.96,61.849 60.96,58.293 60.579,57.912
3.3V on Top Layer (solid): 53.975,64.389 53.721,64.389 53.467,64.135 53.467,62.865 53.594,62.738 53.594,62.484 52.578,62.484 52.578,62.738 52.705,62.865 52.705,65.786 52.832,65.913
GND on Top Layer (solid): 38.1,72.898 62.992,72.898 64.77,71.12 64.77,45.466 62.484,43.18 41.021,43.18 40.005,44.196

## Silkscreen, mask and mechanical layers (free items; w line width, h text height)
Top Overlay:
  region: 43.307,49.911 43.18,49.784 43.18,49.276 43.307,49.149 59.055,49.149 59.182,49.276 59.182,49.784 59.055,49.911
  lines w0.25 net S$147674: 55.372,45.085 56.007,45.085 56.134,45.212 56.134,45.593 56.007,45.72 55.499,45.72 55.372,45.847 55.372,46.228 55.499,46.355 56.134,46.355 ; 56.642,45.085 57.277,45.085 57.404,45.212 57.404,45.593 57.277,45.72 56.769,45.72 56.642,45.847 56.642,46.228 56.769,46.355 57.404,46.355
  lines w0.25 net S$147709: 57.912,45.085 57.912,46.355 58.547,46.355 58.801,46.101 58.801,45.339 58.547,45.085 57.912,45.085
  lines w0.25 net S$158636: 44.196,46.355 44.831,46.355 44.958,46.228 44.958,45.847 44.831,45.72 44.323,45.72 44.196,45.593 44.196,45.212 44.323,45.085 44.958,45.085 ; 45.466,46.355 46.101,46.355 46.228,46.228 46.228,45.847 46.101,45.72 45.593,45.72 45.466,45.593 45.466,45.212 45.593,45.085 46.228,45.085
  lines w0.25 net S$158670: 46.736,45.72 47.371,45.72 47.498,45.847 47.498,46.228 47.371,46.355 46.736,46.355
  lines w0.25 net S$158674: 46.736,45.085 47.371,45.085 47.498,45.212 47.498,45.593 47.371,45.72
  lines w0.25 net S$158678: 48.133,45.212 48.26,45.085 48.768,45.085 48.895,45.212 48.895,46.228 48.768,46.355 48.26,46.355 48.133,46.228 48.133,45.212
  lines w0.25 net S$158712: 50.038,45.085 50.038,46.355
  lines w0.25 net S$158716: 50.038,46.355 50.8,45.085 50.8,46.355
  lines w0.25 net S$158720: 51.308,46.355 51.308,45.466 51.689,45.085 52.07,45.466 52.07,46.355
  lines w0.25 net S$158727: 52.578,45.085 52.578,46.355 52.959,45.974 53.34,46.355 53.34,45.085
  lines w0.25 net S$158731: 53.848,45.085 53.848,46.355
  lines w0.25 net S$158735: 53.848,46.355 54.483,46.355
  lines w0.25 net S$158745: 53.848,45.085 54.483,45.085
  lines w0.25 net S$158749: 53.848,45.732 54.356,45.732
  text "JLCJLCJLCJLC" at 47.498,59.69 h1
Top Solder:
  rectangle: 41.402,40.64 61.849,43.053
Bottom Solder:
  rectangle: 41.402,40.64 61.849,43.053
Document:
  text "打板0.8mm厚度" at 44.196,38.1 h2.03